# EAGLE board hhv-dcdarknet-display (EAGLE 7.2.0)
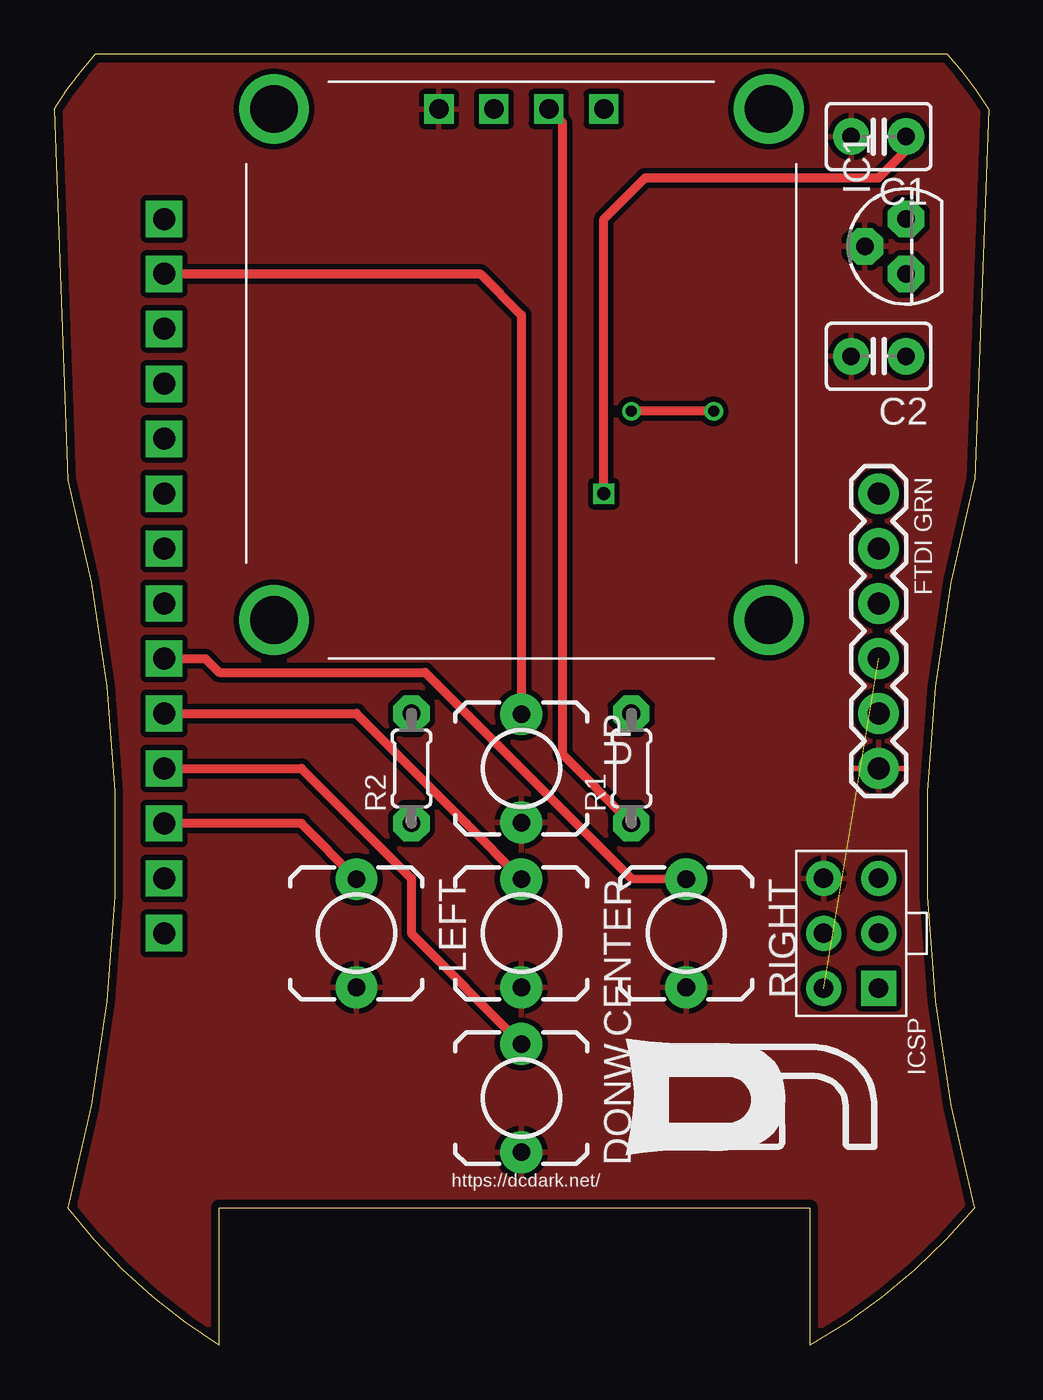
[diagram p0: board, top side]
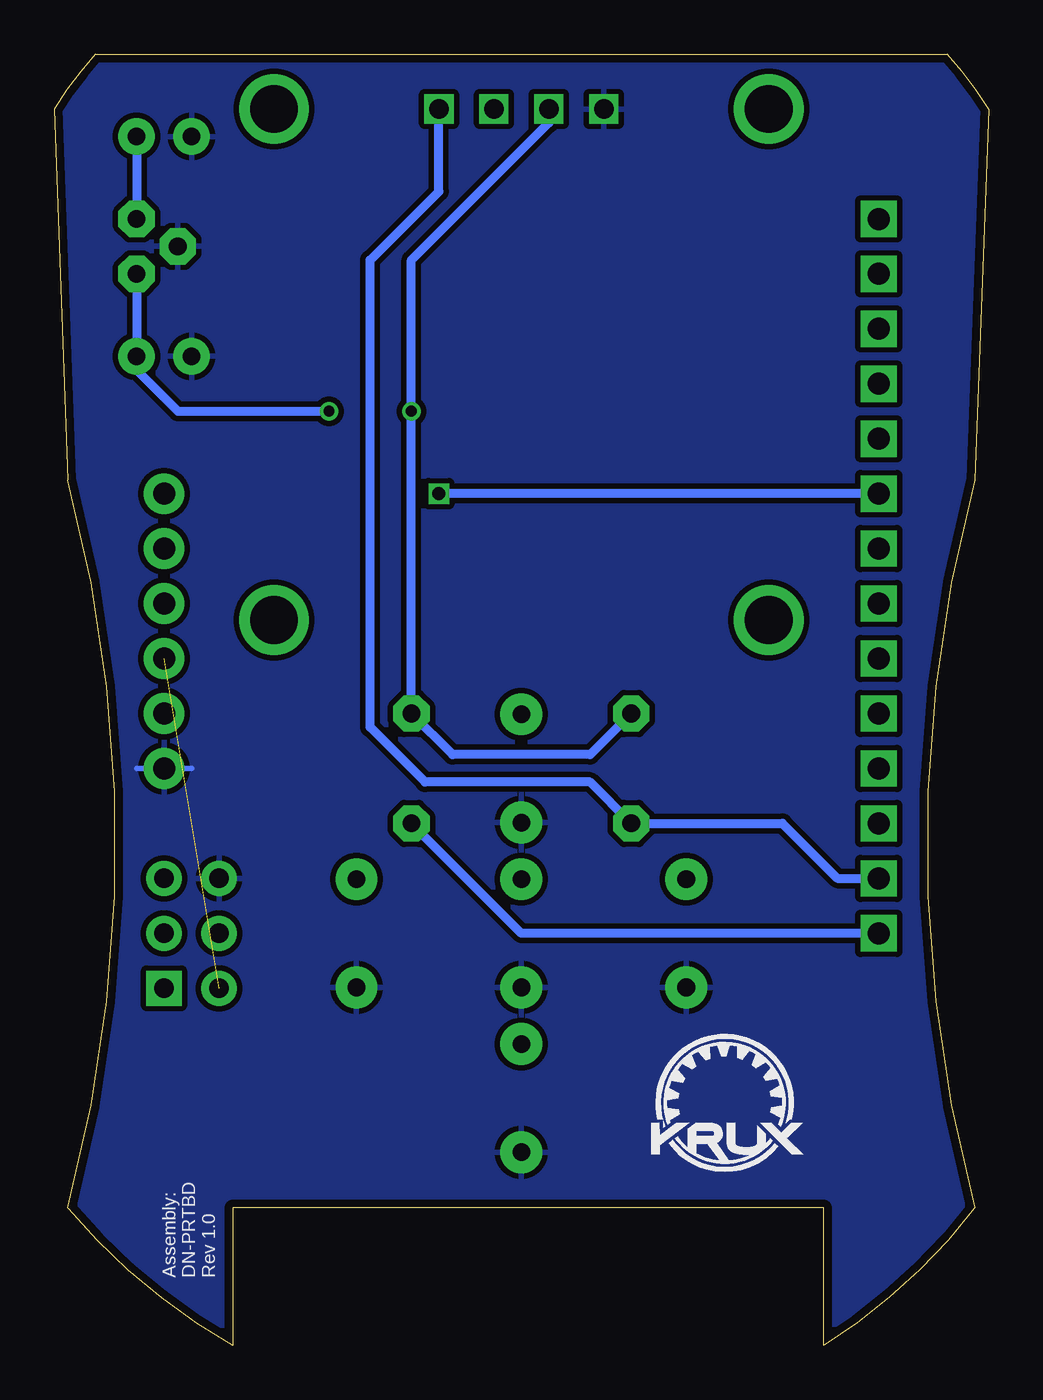
[diagram p1: board, bottom side, seen from below]

Size 43.18 x 59.69 mm. Coordinates in mm from the lower left corner, seen from the top.
Outline: 0.63,40.01 arc-30 0.63,6.35 arc20 7.62,0 7.62,6.35 34.93,6.35 34.93,0 arc20 42.54,6.35 arc-30 42.54,40.01 43.18,57.15 arc10 41.27,59.69 1.91,59.69 arc10 0,57.15 0.63,40.01
Copper layers (1*16): Top 0.0356mm / dielectric 1.5011mm / Bottom 0.0356mm
Design rules "LaenPCBOrder": minimum track width 6mil, minimum drill 13mil, track to track 6mil, track to pad 6mil, pad to pad 6mil, via to via 6mil, smd to smd 6mil, copper to edge 15mil, drill to drill 6mil, minimum pad ring 7mil, minimum via ring 7mil, stop-mask expansion 4mil, vias tented up to drill 0mil, thermal gap 10mil
Net classes: 0 default: clearance 0.205 mm

## Footprints (pad centres in the part's own frame; a part is rotated, then mirrored left to right if it is on the bottom)
C025-030X050 = drill 0.813 pad 1.676: 1 -1.27,0; 2 1.27,0
TACTILE-2PIN = drill 0.813 pad 1.93: P$1 2.502,0; P$2 -2.502,0
TO92 = drill 0.813 pad 1.676 octagon: 1 -1.27,0; 2 0,1.905; 3 1.27,0
AVRISP = drill 0.9 pad 1.626 square: 1 -1.27,2.54 | drill 0.9 pad 1.626: 2 1.27,2.54; 3 -1.27,0; 4 1.27,0; 5 -1.27,-2.54; 6 1.27,-2.54
FTDI_BASIC = drill 1.016 pad 1.88: CTS 10.16,0; DTR 0,0; GND 12.7,0; RXI 2.54,0; TXO 5.08,0; VCC 7.62,0
1X1-SMALL_CUT = drill 1.016 pad 1.676 square: P$1 0,0
0204/5 = drill 0.813 pad 1.676 octagon: 1 -2.54,0; 2 2.54,0
I2C_0.96_OLED = drill 0.9 square: GND -3.81,0; SCL 1.27,0; SDA 3.81,0; VCC -1.27,0 | drill 2.2: P$5 11.43,0; P$6 -11.43,0; P$7 11.43,-23.622; P$8 -11.43,-23.622

## Placement (x,y rotation side)
C1  .1uF  [C025-030X050]  38.1,55.88 180 top
C2  .1uF  [C025-030X050]  38.1,45.72 180 top
CENTER  SWITCH_TACTILETACTILE-2PIN  [TACTILE-2PIN]  21.59,19.05 270 top
DONW  SWITCH_TACTILETACTILE-2PIN  [TACTILE-2PIN]  21.59,11.43 270 top
IC1  7803  [TO92]  39.37,50.8 90 top
JP1  JP1  [AVRISP]  36.83,19.05 180 top
JP2  FTDI_BASICPTH  [FTDI_BASIC]  38.1,39.37 270 top
JP17  [1X1-SMALL_CUT]  5.08,52.07 0 top
JP18  [1X1-SMALL_CUT]  5.08,49.53 0 top
JP19  [1X1-SMALL_CUT]  5.08,46.99 0 top
JP20  [1X1-SMALL_CUT]  5.08,44.45 0 top
JP21  [1X1-SMALL_CUT]  5.08,41.91 0 top
JP22  [1X1-SMALL_CUT]  5.08,39.37 0 top
JP23  [1X1-SMALL_CUT]  5.08,36.83 0 top
JP24  [1X1-SMALL_CUT]  5.08,34.29 0 top
JP25  [1X1-SMALL_CUT]  5.08,31.75 0 top
JP26  [1X1-SMALL_CUT]  5.08,29.21 0 top
JP27  [1X1-SMALL_CUT]  5.08,26.67 0 top
JP28  [1X1-SMALL_CUT]  5.08,24.13 0 top
JP29  [1X1-SMALL_CUT]  5.08,21.59 0 top
JP30  [1X1-SMALL_CUT]  5.08,19.05 0 top
LEFT  SWITCH_TACTILETACTILE-2PIN  [TACTILE-2PIN]  13.97,19.05 270 top
R1  [0204/5]  26.67,26.67 90 top
R2  [0204/5]  16.51,26.67 90 top
RIGHT  SWITCH_TACTILETACTILE-2PIN  [TACTILE-2PIN]  29.21,19.05 270 top
U$1  KRUX_LOGO  [KRUX_LOGO]  12.22,11.27 0 bottom
U$2  DN_LOGO  [DN_LOGO]  26.04,8.89 0 top
U$3  I2C_0.96_OLEDOLED  [I2C_0.96_OLED]  21.59,57.15 0 top
UP  SWITCH_TACTILETACTILE-2PIN  [TACTILE-2PIN]  21.59,26.67 270 top

## Library data of the parts
C1 C2 IC1 JP17-JP30 = adafruit
CENTER DONW JP1 LEFT R1 R2 RIGHT U$1-U$3 UP = SYNShop
JP2 = SparkFun

## Nets
+3V3: C1.1 IC1.3 JP22.P$1
+5V: JP1.2 JP2.VCC
GND: C1.2 C2.2 CENTER.P$1 DONW.P$1 IC1.2 JP1.6 JP2.GND LEFT.P$1 RIGHT.P$1 U$3.GND UP.P$1
PIN15: JP17.P$1
PIN16: JP18.P$1 UP.P$2
PIN17: JP19.P$1
PIN18: JP20.P$1
PIN19: JP21.P$1
PIN21: JP23.P$1
PIN22: JP24.P$1
PIN23: JP25.P$1 RIGHT.P$2
PIN24: CENTER.P$2 JP26.P$1
PIN25: DONW.P$2 JP27.P$1
PIN26: JP28.P$1 LEFT.P$2
PIN27: JP29.P$1 R2.1 U$3.SDA
PIN28: JP30.P$1 R1.1 U$3.SCL
VCC3: C2.1 IC1.1 R1.2 R2.2 U$3.VCC

## Tracks (layer width: path | path; a pad name or v marks a point on that pad's centre or on a via)
+3V3  (via drill 0.6)
  Top 0.406: v25.4,39.37 25.4,52.07 27.3,53.98 38.1,53.98 39.37,55.24 C1.1
  Bottom 0.406: C1.1 IC1.3 | JP22.P$1 v25.4,39.37
+5V  (1 unrouted)
GND
  Top 0.254: 36.83,26.67 39.37,26.67
  Bottom 0.254: 36.83,26.67 39.37,26.67
  pour Top (isolate 0.254): 2.22,59.37 0,57.15 0.63,40.01 1.27,38.1 2.54,30.48 2.86,20.64 2.22,13.34 0.63,6.35 2.54,4.13 4.76,1.91 7.62,0 7.62,6.35 34.93,6.35 34.93,0 36.83,1.27 39.37,3.49 42.23,6.35 41.27,11.11 40.64,16.19 40.32,24.77 40.96,32.7 42.54,40.01 43.18,56.83 40.96,59.69
  pour Bottom (isolate 0.254): 2.22,59.37 0,57.15 0.63,40.01 1.27,38.1 2.54,30.48 2.86,20.64 2.22,13.34 0.63,6.35 2.54,4.13 4.76,1.91 7.62,0 7.62,6.35 34.93,6.35 34.93,0 36.83,1.27 39.37,3.49 42.23,6.35 41.27,11.11 40.64,16.19 40.32,24.77 40.96,32.7 42.54,40.01 43.18,56.83 40.96,59.69
PIN16
  Top 0.406: JP18.P$1 19.69,49.53 21.59,47.62 UP.P$2
PIN23
  Top 0.406: JP25.P$1 6.98,31.75 7.62,31.11 17.15,31.11 26.67,21.59 RIGHT.P$2
PIN24
  Top 0.406: JP26.P$1 13.97,29.21 19.05,24.13 CENTER.P$2
PIN25
  Top 0.406: JP27.P$1 11.43,26.67 16.51,21.59 16.51,19.05 DONW.P$2
PIN26
  Top 0.406: LEFT.P$2 11.43,24.13 JP28.P$1
PIN27
  Bottom 0.406: JP29.P$1 6.98,21.59 9.52,24.13 R2.1 18.41,26.04 26.04,26.04 28.57,28.57 28.57,50.16 25.4,53.34 U$3.SDA
PIN28
  Top 0.406: R1.1 23.49,27.3 23.49,56.52 U$3.SCL
  Bottom 0.406: JP30.P$1 21.59,19.05 R1.1
VCC3  (via drill 0.5)
  Top 0.406: v30.48,43.18 v26.67,43.18
  Bottom 0.406: U$3.VCC 20.32,56.52 26.67,50.16 v26.67,43.18 R1.2 24.76,27.3 18.41,27.3 R2.2 | IC1.1 C2.1 39.37,45.09 37.46,43.18 v30.48,43.18

## Text on the board
_tsilk: FTDI GRN | ICSP | https://dcdark.net/
_bsilk: Assembly: / DN-PRTBD / Rev 1.0